# Altium PCB ControlsPcbv3.PcbDoc
Units mil, origin at the board's own origin, x right, y up, seen from the top; angles counter-clockwise.
Board outline 2930.43 x 3340.82 mil, 2 copper layers (Top Layer, Bottom Layer); 15 components, 17 nets, 135 pads, 0 vias.
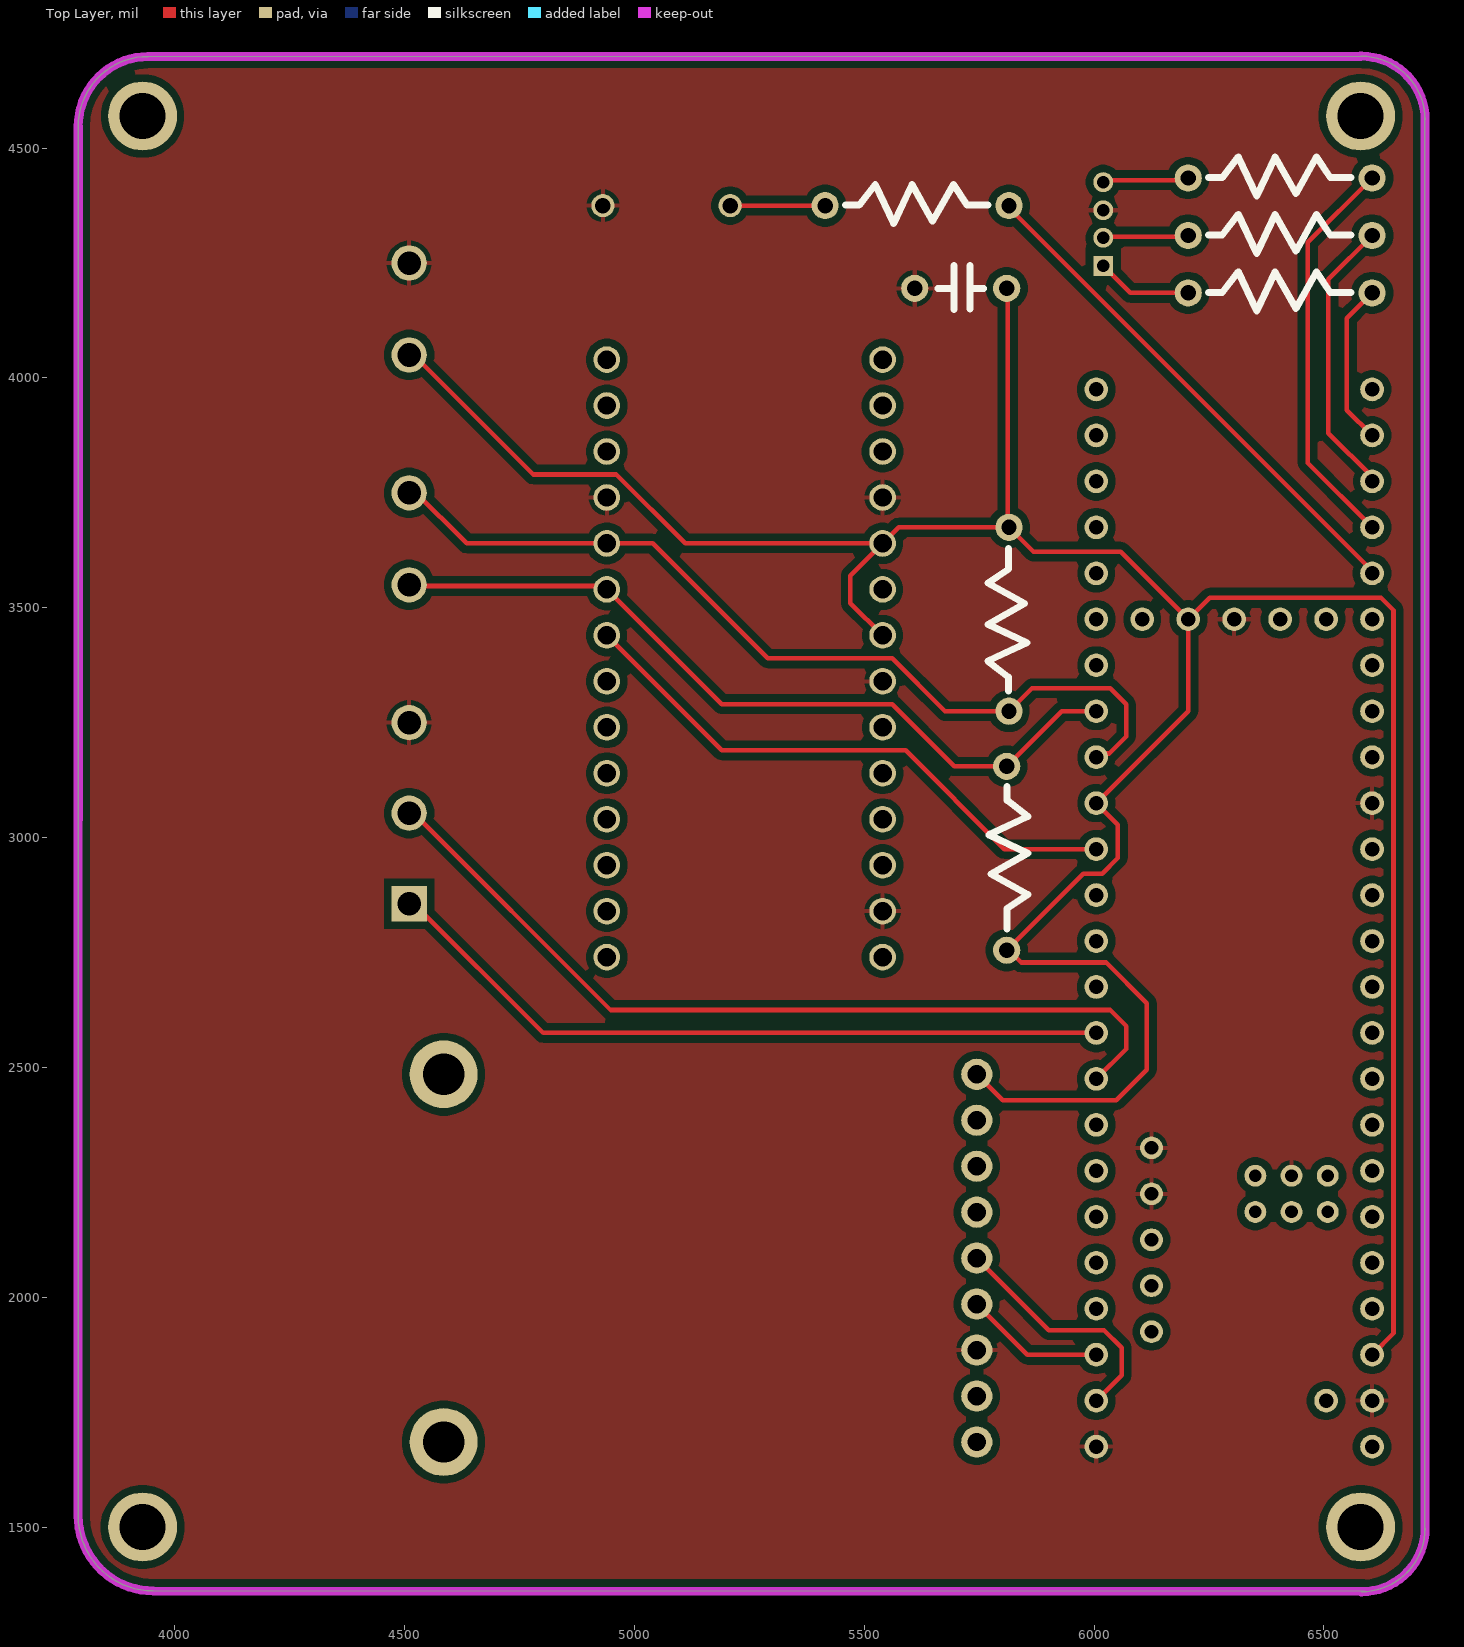
[diagram p0: Top Layer view]
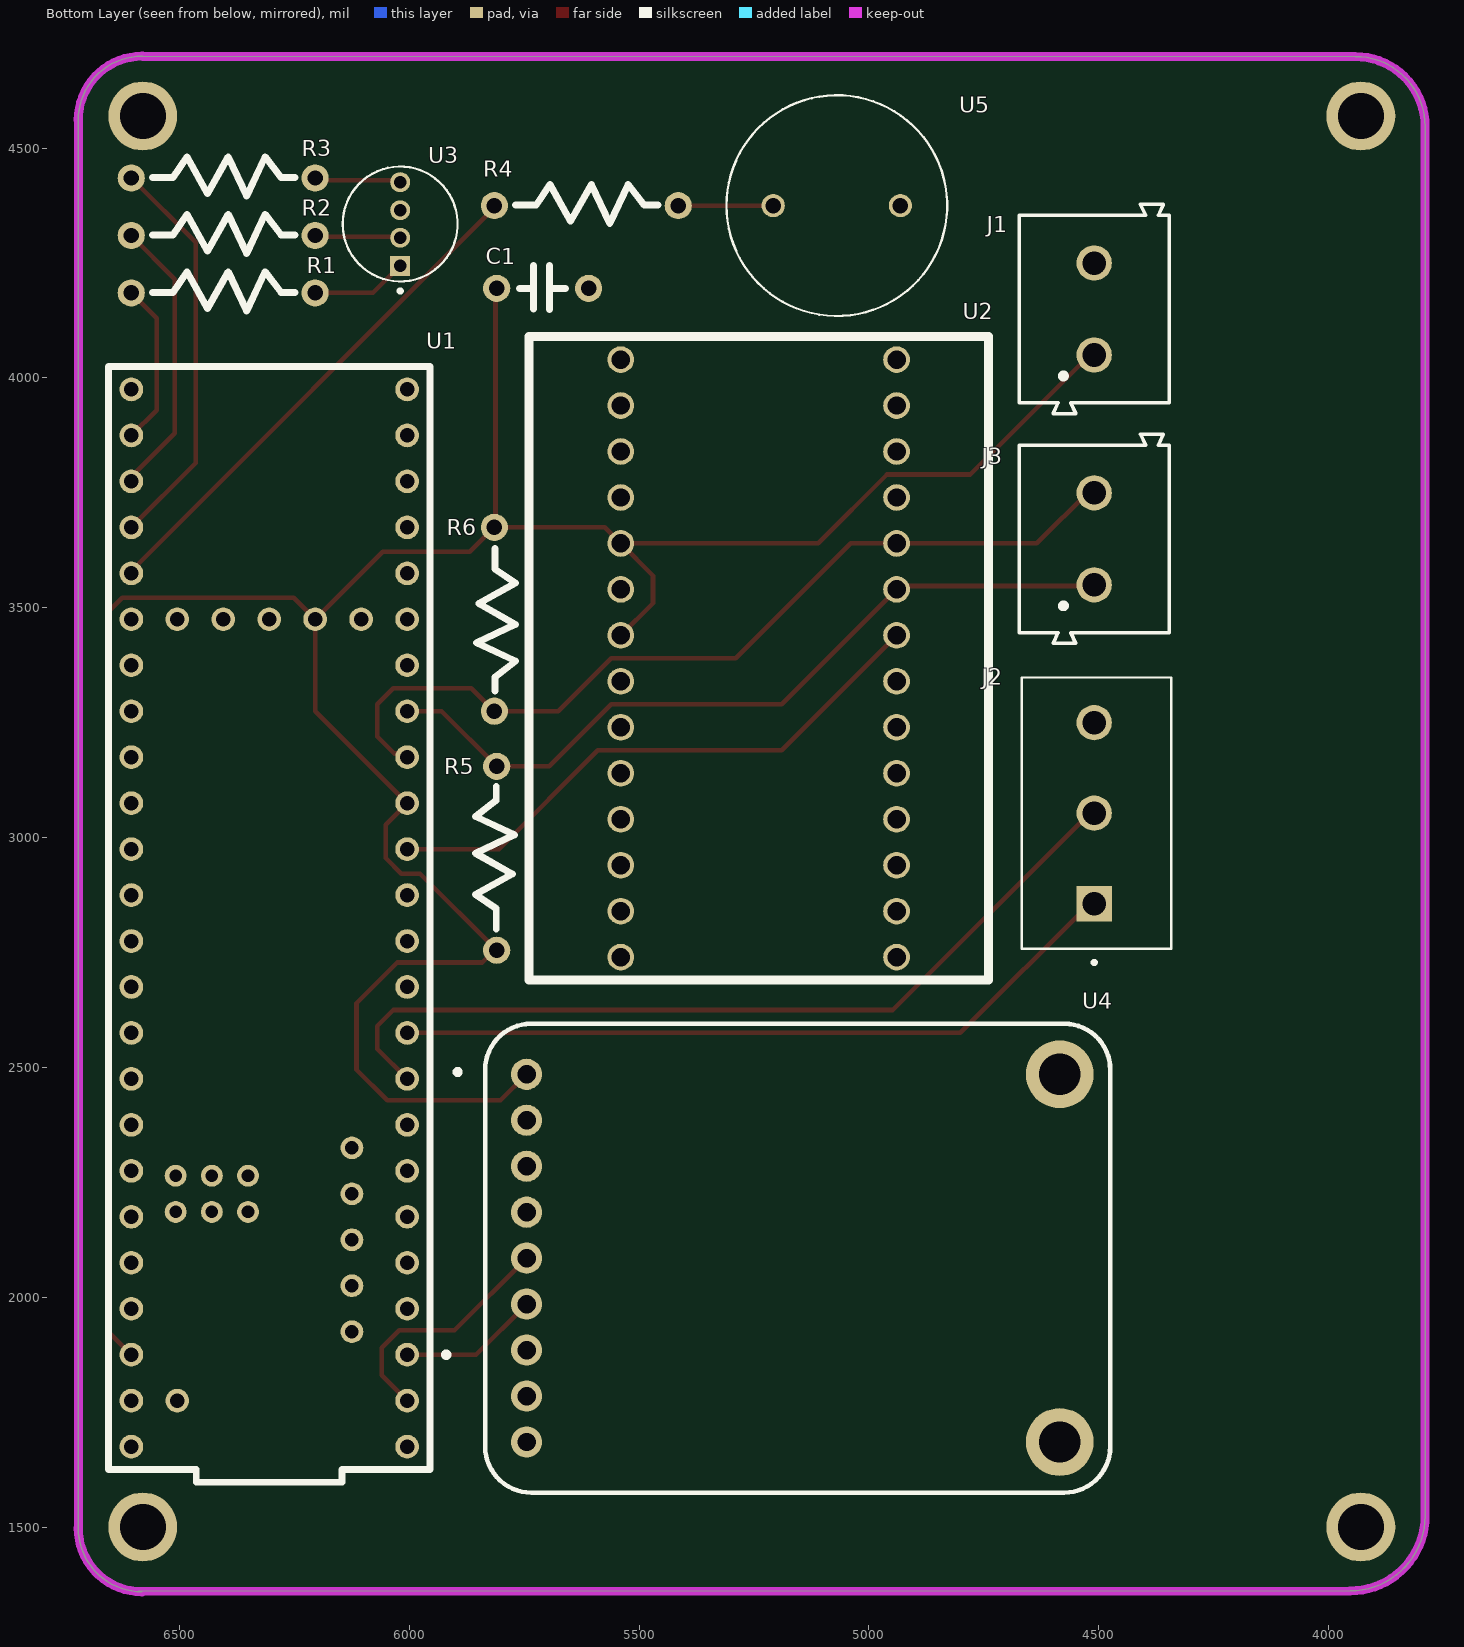
[diagram p1: Bottom Layer view, seen from below]

## Layer stack, top to bottom
Top Solder: solder mask 0.4, Solder Resist, Dk 3.5
Top Layer: signal copper 1.4
Dielectric 1: dielectric 12.6, FR-4, Dk 4.8
Bottom Layer: signal copper 1.4
Bottom Solder: solder mask 0.4, Solder Resist, Dk 3.5

## Board outline
3790,1524.3 3790,4547.15 cw(c3942.23,4547.15) 3942.23,4699.38 6580,4700 6581.75,4700 cw(c6581.75,4561.39) 6720.37,4561.39 6720,4570 6720,1490 6720.43,1497.8 cw(c6581.81,1497.8) 6581.81,1359.18 6590,1360 3953.21,1361.09 cw(c3953.21,1524.3)

## Design rules (kind name [scope] priority, off if disabled: settings)
Clearance [All] p1: gap=16 ignorepadtopadclearanceinfootprint=FALSE
PolygonConnect [All] p1: connectstyle=Relief reliefconductorwidth=10 reliefentries=4 polygonreliefangle="90 Angle" airgapwidth=10
RoutingVias [All] p1: holewidth=28 width=50 viastyle="Through Hole" minholewidth=28 minwidth=50 maxholewidth=28 maxwidth=50
SolderMaskExpansion [All] p1: expansion=4 istentingtop=FALSE
SupplyNets "Schematic Supply Nets_1" [InNet('3V3')] p1: voltage=0.000
SupplyNets "Schematic Supply Nets" [InNet('GND')] p2: voltage=0.000
Width [All] p1: maxlimit=10 minlimit=10 preferedwidth=10
30 further rules are at their usual default settings.

## Components (designator, comment, footprint, x,y, rotation, side; value= is the part's Value field where it differs from the comment)
C1 "470nF" "[CAP] CAPC_TH_100MIL" 5610,4195 r90 bottom
J1 "[Connector] 691213510002" "[CONNECTOR] 5MM_2PORT_SCREW" 4510,4150 r90 bottom
J2 "[Connector]1x3_Header" 3POS_5MM_PHOENIX 4342.68,2757.87 r90 bottom
J3 "[Connector] 691213510002" "[CONNECTOR] 5MM_2PORT_SCREW" 4510,3650 r90 bottom
R1 "220" "[RES] 1/4W TH RES" 6605,4185 r270 bottom
R2 "220" "[RES] 1/4W TH RES" 6605,4310 r270 bottom
R3 "220" "[RES] 1/4W TH RES" 6605,4435 r270 bottom
R4 "100" "[RES] 1/4W TH RES" 5815,4375 r270 bottom
R5 "2.7k" "[RES] 1/4W TH RES" 5810,2755 r180 bottom
R6 "2.7k" "[RES] 1/4W TH RES" 5815,3675 r0 bottom
U1 "[MCU] DEV-16771" "[MCU] MODULE_DEV-16771" 6304.92,2825 r90 bottom
U2 "[IC] MTI-3-8A7G6T" "[IC] DIP28" 5540,4040 r180 bottom
U3 "QBL8RGB60D0-2897" "[LED] LED_QBL8RGB60D0-2897" 6020,4335 r90 bottom
U4 "GPS" "[IC] Ultimate-GPS-v3" 5745,1685 r180 bottom
U5 "[Act] PS1240P02BT" "[ACT] XDCR_PS1240P02BT - duplicate" 5070,4375 r0 bottom

## Footprints (in the part's own frame and the unit in brackets; to place one, negate y for a bottom-side part, rotate by r counter-clockwise, add the part's x,y. Pads: shape width x height; smd on the part's side, far side on the other; paste and mask are expansions set on the pad)
3POS_5MM_PHOENIX [mm] "_1935174"
  rect 1.95x1.95 / inner round 1.95 / far side rect 1.95x1.95 hole 1.3: 1(2.5,4.25)
  round 1.95 hole 1.3: 2(7.5,4.25) 3(12.5,4.25)
  silkscreen extent -0.85,0 15,8.25, body extent -0.1,-0.75 15.57,8.25, height 11.55
"[ACT] XDCR_PS1240P02BT - duplicate" [mm]
  round 1.28 hole 0.85: 1(-3.516,0) 2(3.516,0)
  silkscreen extent -6.1,-6.1 6.1,6.1, body extent -6.1,-5.97 6.1,6.23, height 6.51
"[CAP] CAPC_TH_100MIL" [mm] "through hole cap with 100mil clearance"
  round 1.5 hole 0.85: 1(0,0) 2(0,5.08)
  silkscreen extent -1.16,1.27 1.27,3.81
"[CONNECTOR] 5MM_2PORT_SCREW" [mm] "5.08 mm pitch 2 port screw terminal / 691213510002"
  round 1.95 hole 1.3: 1(-2.54,0) 2(2.54,0)
  silkscreen extent -5.78,-4.15 5.78,4.15, body extent -5.68,-4.04 5.68,4.06, height 10
"[IC] DIP28" [mil]
  round 58 hole 40: 1(0,0) 2(0,-100) 3(0,-200) 4(0,-300) 5(0,-400) 6(0,-500) 7(0,-600) 8(0,-700) 9(0,-800) 10(0,-900) 11(0,-1000) 12(0,-1100) 13(0,-1200) 14(0,-1300) 15(600,-1300) 16(600,-1200) 17(600,-1100) 18(600,-1000) 19(600,-900) 20(600,-800) 21(600,-700) 22(600,-600) 23(600,-500) 24(600,-400) 25(600,-300) 26(600,-200) 27(600,-100) 28(600,0)
  silkscreen extent -200,-1350 800,50
"[IC] Ultimate-GPS-v3" [mm]
  round 1.724 hole 1.02: 1(0,20.32) 2(0,17.78) 3(0,15.24) 4(0,12.7) 5(0,10.16) 6(0,7.62) 7(0,5.08) 8(0,2.54) 9(0,0)
  round 3.748 hole 2.286: MH1(29.464,0) MH2(29.464,20.32)
  silkscreen extent -3.94,-2.79 32.26,23.11, body extent -2.03,-2.54 32,22.86, height 9.55
"[LED] LED_QBL8RGB60D0-2897" [mm]
  rect 1.1x1.1 / inner round 1.1 / far side rect 1.1x1.1 hole 0.7: 1(-2.311,0)
  round 1.1 hole 0.7: 2(-0.762,0) 3(0.762,0) 4(2.311,0)
  silkscreen extent -3.8,-3.17 3.17,3.17, body extent -2.91,-2.93 2.4,2.93, height 8.65
"[MCU] MODULE_DEV-16771" [mm]
  round 1.308 hole 0.8: 0(-26.67,-7.62) 1(-24.13,-7.62) 2(-21.59,-7.62) 3(-19.05,-7.62) 3.3V_1(6.35,-7.62) 3.3V_2(-24.13,7.62) 3.3V_3(16.51,-2.54) 4(-16.51,-7.62) 5(-13.97,-7.62) 6(-11.43,-7.62) 7(-8.89,-7.62) 8(-6.35,-7.62) 9(-3.81,-7.62) 10(-1.27,-7.62) 11(1.27,-7.62) 12(3.81,-7.62) 13(3.81,7.62) 14(1.27,7.62) 15(-1.27,7.62) 16(-3.81,7.62) 17(-6.35,7.62) 18(-8.89,7.62) 19(-11.43,7.62) 20(-13.97,7.62) 21(-16.51,7.62) 22(-19.05,7.62) 23(-21.59,7.62) 24(8.89,-7.62) 25(11.43,-7.62) 26(13.97,-7.62) 27(16.51,-7.62) 28(19.05,-7.62) 29(21.59,-7.62) 30(24.13,-7.62) 31(26.67,-7.62) 32(29.21,-7.62) 33(29.21,7.62) 34(26.67,7.62) 35(24.13,7.62) 36(21.59,7.62) 37(19.05,7.62) 38(16.51,7.62) 39(13.97,7.62) 40(11.43,7.62) 41(8.89,7.62) GND1(-29.21,-7.62) GND2(6.35,7.62) GND3(-26.67,7.62) GND4(16.51,0) ON/OFF(16.51,5.08) PROGRAM(16.51,2.54) VBAT(16.51,-5.08) VIN(-29.21,7.62) VUSB(-26.67,5.08)
  round 1.258 hole 0.75: 5V(-22.86,-4.57) D+(-17.78,-4.57) D-(-20.32,-4.57) USB_GND1(-15.24,-4.57) USB_GND2(-12.7,-4.57)
  round 1.208 hole 0.7: GND5(-14.24,3.17) LED(-16.24,3.17) R+(-16.24,5.17) R-(-14.24,5.17) T+(-14.24,1.17) T-(-16.24,1.17)
  silkscreen extent -31.18,-9.88 30.48,8.89, body extent -31.18,-8.89 30.48,8.89, height 7.15
"[RES] 1/4W TH RES" [mm]
  round 1.5 hole 0.85: 1(0,10.16) 2(0,0)
  silkscreen extent -1.17,1.17 0.99,9.04

## Part data
C1: library part "[Cap] Ceramic Cap", "Ceramic cap", Package="RADIAL-2 Panasonic", Availability="In Stock", Check_prices=https://www.snapeda.com/parts/EEUFM1H101/Panasonic/view-part/1510333/?ref=eda, MF=Panasonic, MP=EEUFM1H101, Price=None, SnapEDA_Link=https://www.snapeda.com/parts/EEUFM1H101/Panasonic/view-part/1510333/?ref=snap
J1 J3: "2 Position Wire to Board Terminal Block Horizontal with Board 0.200 (5.08mm) Through Hole", Package=None, Check_prices=https://www.snapeda.com/parts/691213510002/W%25C3%25BCrth+Elektronik+Midcom/view-part/?ref=eda, MF="WÃ¼rth Elektronik", MP=691213510002, SnapEDA_Link=https://www.snapeda.com/parts/691213510002/W%25C3%25BCrth+Elektronik+Midcom/view-part/?ref=snap
J2: "PCB Terminal Screw 5mm 16AWG 400V 17.5A 3 Position COMBICON PT Series", Package=None, Check_prices=https://www.snapeda.com/parts/1935174/Phoenix+Contact/view-part/?ref=eda, MF="Phoenix Contact", MP=1935174, SnapEDA_Link=https://www.snapeda.com/parts/1935174/Phoenix+Contact/view-part/?ref=snap
R1 R2 R3 R4 R5 R6: library part "[Res] RC0603FR-0710KL", "10 kOhms Â±1% 0.1W, 1/10W Chip Resistor 0603 (1608 Metric) Moisture Resistant Thick Film", Package="0603 Yageo", Check_prices=https://www.snapeda.com/parts/RC0603FR-0710KL/Yageo/view-part/?ref=eda, MF=Yageo, MP=RC0603FR-0710KL, SnapEDA_Link=https://www.snapeda.com/parts/RC0603FR-0710KL/Yageo/view-part/?ref=snap
U1: "RT1062 Teensy 4.1 series ARM® Cortex®-M7 MPU Embedded Evaluation Board", Package=None, Check_prices=https://www.snapeda.com/parts/DEV-16771/SparkFun+Electronics/view-part/?ref=eda, MF="SparkFun Electronics", MP=DEV-16771, SnapEDA_Link=https://www.snapeda.com/parts/DEV-16771/SparkFun+Electronics/view-part/?ref=snap
U2: "Accelerometer, Gyroscope, Magnetometer, 9 Axis Sensor IÂ²C, SPI Output", Package="SMD-28 Xsens Technologies", Availability=Bad, Check_prices=https://www.snapeda.com/parts/MTI-3-8A7G6T/XSens%20Technologies%20BV/view-part/1464840/?ref=eda, MF="XSens Technologies", MP=MTI-3-8A7G6T, Price=None, SnapEDA_Link=https://www.snapeda.com/parts/MTI-3-8A7G6T/XSens%20Technologies%20BV/view-part/1464840/?ref=snap
U3: "Red, Green, Blue (RGB) 624nm Red, 525nm Green, 470nm Blue LED Indication - Discrete 2V Red, 3.2V Green, 3.2V Blue Radial", Package="Radial QT Brightek (QTB)", Check_prices=https://www.snapeda.com/parts/QBL8RGB60D0-2897/QT/view-part/?ref=eda, MF="QT Brightek (QTB)", MP=QBL8RGB60D0-2897, SnapEDA_Link=https://www.snapeda.com/parts/QBL8RGB60D0-2897/QT/view-part/?ref=snap
U4: library part Ultimate-GPS-v3
U5: "Buzzers Transducer, Externally Driven Piezo 3V 4kHz 60dB @ 3V, 10cm Through Hole PC Pins", Package="2020 TDK", Availability=Unavailable, MF=TDK, MP=PS1240P02BT, Price=None, SnapEDA_Link=https://www.snapeda.com/parts/PS1240P02BT/TDK/view-part/53420/?ref=snap

## Free pads (board coordinates)
  round 150 hole 100: MH(3930,1500) MH(3930,4570) MH(6580,1500) MH(6580,4570)

## Nets (pads, with @x,y where several pads share a name; then routed paths per layer and width w, separated by ;. In a path a pad name is that pad's centre, name@x,y a point inside that pad or via, vN(x,y) a via of type N, cw(c..) or ccw(c..) an arc to the next point about the centre after c; other vN are vias at no path point)
3V3: C1.2 J1.1 R5.2 R6.2 U1.3.3V_1 U1.3.3V_2 U1.3.3V_3 U2.5 U2.7 U4.1 | length 6713.5
  Top Layer w10: J1.1@4520,4050 4780,3790 4960.71,3790 5110.71,3640 U2.5 ; U2.7 5470,3510 5470,3570 U2.5 ; U4.1 5801.75,2428.25 6048.25,2428.25 6115,2495 6115,2640 6026.75,2728.25 5841.44,2728.25 5814.69,2755 R5.2 5976.75,2921.75 6017.78,2921.75 6051.67,2955.64 6051.67,3028.25 U1.3.3V_1 6204.92,3275 U1.3.3V_3 ; C1.2 5812.5,4192.5 5812.5,3677.5 R6.2 ; U1.3.3V_2 6651.67,1921.75 6651.67,3494.36 6624.28,3521.75 6251.67,3521.75 U1.3.3V_3 ; U2.5 5575,3675 R6.2 ; R6.2 5868.25,3621.75 6058.17,3621.75 U1.3.3V_3
DRDY: U1.12 U2.22 | length 1257.5
  Top Layer w10: U2.22 5190,3190 5590,3190 5805,2975 U1.12
GND: C1.1 J1.2 J2.3 U1.GND1 U1.GND2 U1.GND3 U1.GND4 U1.GND5 U1.USB_GND1 U1.USB_GND2 U2.4 U2.8 U2.13 U2.25 U3.3 U4.7 U5.1
LED_BLUE: R2.2 U1.35 | length 613.7
  Top Layer w10: U1.35 6604.92,3785.08 6510,3880 6510,4215 R2.2
LED_GREEN: R1.2 U1.34 | length 355.5
  Top Layer w10: U1.34 6550,3929.92 6550,4130 R1.2
LED_RED: R3.2 U1.36 | length 875.9
  Top Layer w10: U1.36 6465,3814.92 6465,4295 R3.2
NetR1_1: R1.1 U3.1 | length 209.4
  Top Layer w10: U3.1 6079,4185 R1.1
NetR2_1: R2.1 U3.2 | length 187.1
  Top Layer w10: U3.2 6022.5,4307.5 6202.5,4307.5 R2.1
NetR3_1: R3.1 U3.4 | length 188.7
  Top Layer w10: U3.4 6024.5,4430.5 6200.5,4430.5 R3.1
NetR4_1: R4.1 U5.2 | length 206.6
  Top Layer w10: U5.2 R4.1
PIEZO_IN: R4.2 U1.37 | length 1127.2
  Top Layer w10: R4.2 5815,4369.96 6604.92,3580.04 U1.37
RX1: U1.0 U4.5 | length 533.6
  Top Layer w10: U4.5 5901.75,1928.25 6021.75,1928.25 6060,1890 6060,1830.08 U1.0
RX2: J2.2 U1.7 | length 1883.8
  Top Layer w10: J2.2@4520,3053.15 4948.15,2625 6035,2625 6070,2590 6070,2540.08 U1.7
SCL: J3.2 R6.1 U1.24 U2.24 | length 1937.7
  Top Layer w10: J3.2@4520,3755 4635,3640 U2.24 5040,3640 5290,3390 5560.71,3390 5675.71,3275 R6.1 5865,3325 6035,3325 6070,3290 6070,3220 6032.94,3182.94 6012.86,3182.94 U1.24
SDA: J3.1 R5.1 U1.25 U2.23 | length 1700.3
  Top Layer w10: J3.1@4520,3555 4527.5,3547.5 4932.5,3547.5 U2.23 5190,3290 5560.71,3290 5695.71,3155 R5.1 5930,3275 U1.25
TX1: U1.1 U4.6 | length 305.5
  Top Layer w10: U4.6 5855,1875 U1.1
TX2: J2.1 U1.8 | length 1601.4
  Top Layer w10: J2.1@4520,2856.3 4801.3,2575 U1.8
pads on no net: U1.2 U1.3 U1.4 U1.5 U1.5V U1.6 U1.9 U1.10 U1.11 U1.13 U1.14 U1.15 U1.16 U1.17 U1.18 U1.19 U1.20 U1.21 U1.22 U1.23 U1.26 U1.27 U1.28 U1.29 U1.30 U1.31 U1.32 U1.33 U1.38 U1.39 U1.40 U1.41 U1.D+ U1.D- U1.LED U1.ON/OFF U1.PROGRAM U1.R+ U1.R- U1.T+ U1.T- U1.VBAT U1.VIN U1.VUSB U2.1 U2.2 U2.3 U2.6 U2.9 U2.10 U2.11 U2.12 U2.14 U2.15 U2.16 U2.17 U2.18 U2.19 U2.20 U2.21 U2.26 U2.27 U2.28 U4.2 U4.3 U4.4 U4.8 U4.9 U4.MH1 U4.MH2

## Polygon pours and split planes (outlines as drawn)
GND on Top Layer "gnd_tl" (solid, pour order 0): 3790,1524.3 3790,4547.15 cw(c3942.23,4547.15) 3942.23,4699.38 6580,4700 6581.75,4700 cw(c6581.75,4561.39) 6720.37,4561.39 6720,4570 6720,1490 6720.43,1497.8 cw(c6581.81,1497.8) 6581.81,1359.18 6590,1360 3953.21,1361.09 cw(c3953.21,1524.3)

## Keep-outs
Keep-Out Layer:
  lines w19.68: 6580,4700 3942.23,4699.38 ccw(c3942.23,4547.15) 3790,4547.15 3790,1524.3 ccw(c3953.21,1524.3) 3953.21,1361.09 6590,1360 ; 6581.75,4700 cw(c6581.75,4561.39) 6720.37,4561.39 ; 6581.81,1359.18 ccw(c6581.81,1497.8) 6720.43,1497.8 ; 6720,1490 6720,4570

## Text inside footprints (layer, text, board x,y; h text height)
U1: Mechanical 13 "Teensy 4.1" at 6318.31,2815.16 h50 r270